# Altium PCB PCB1.PcbDoc
Units mm, origin at the board's own origin, x right, y up, seen from the top; angles counter-clockwise.
Board outline 81.5 x 88.9 mm, 2 copper layers (Top Layer, Bottom Layer); 24 components, 24 nets, 116 pads, 17 vias.
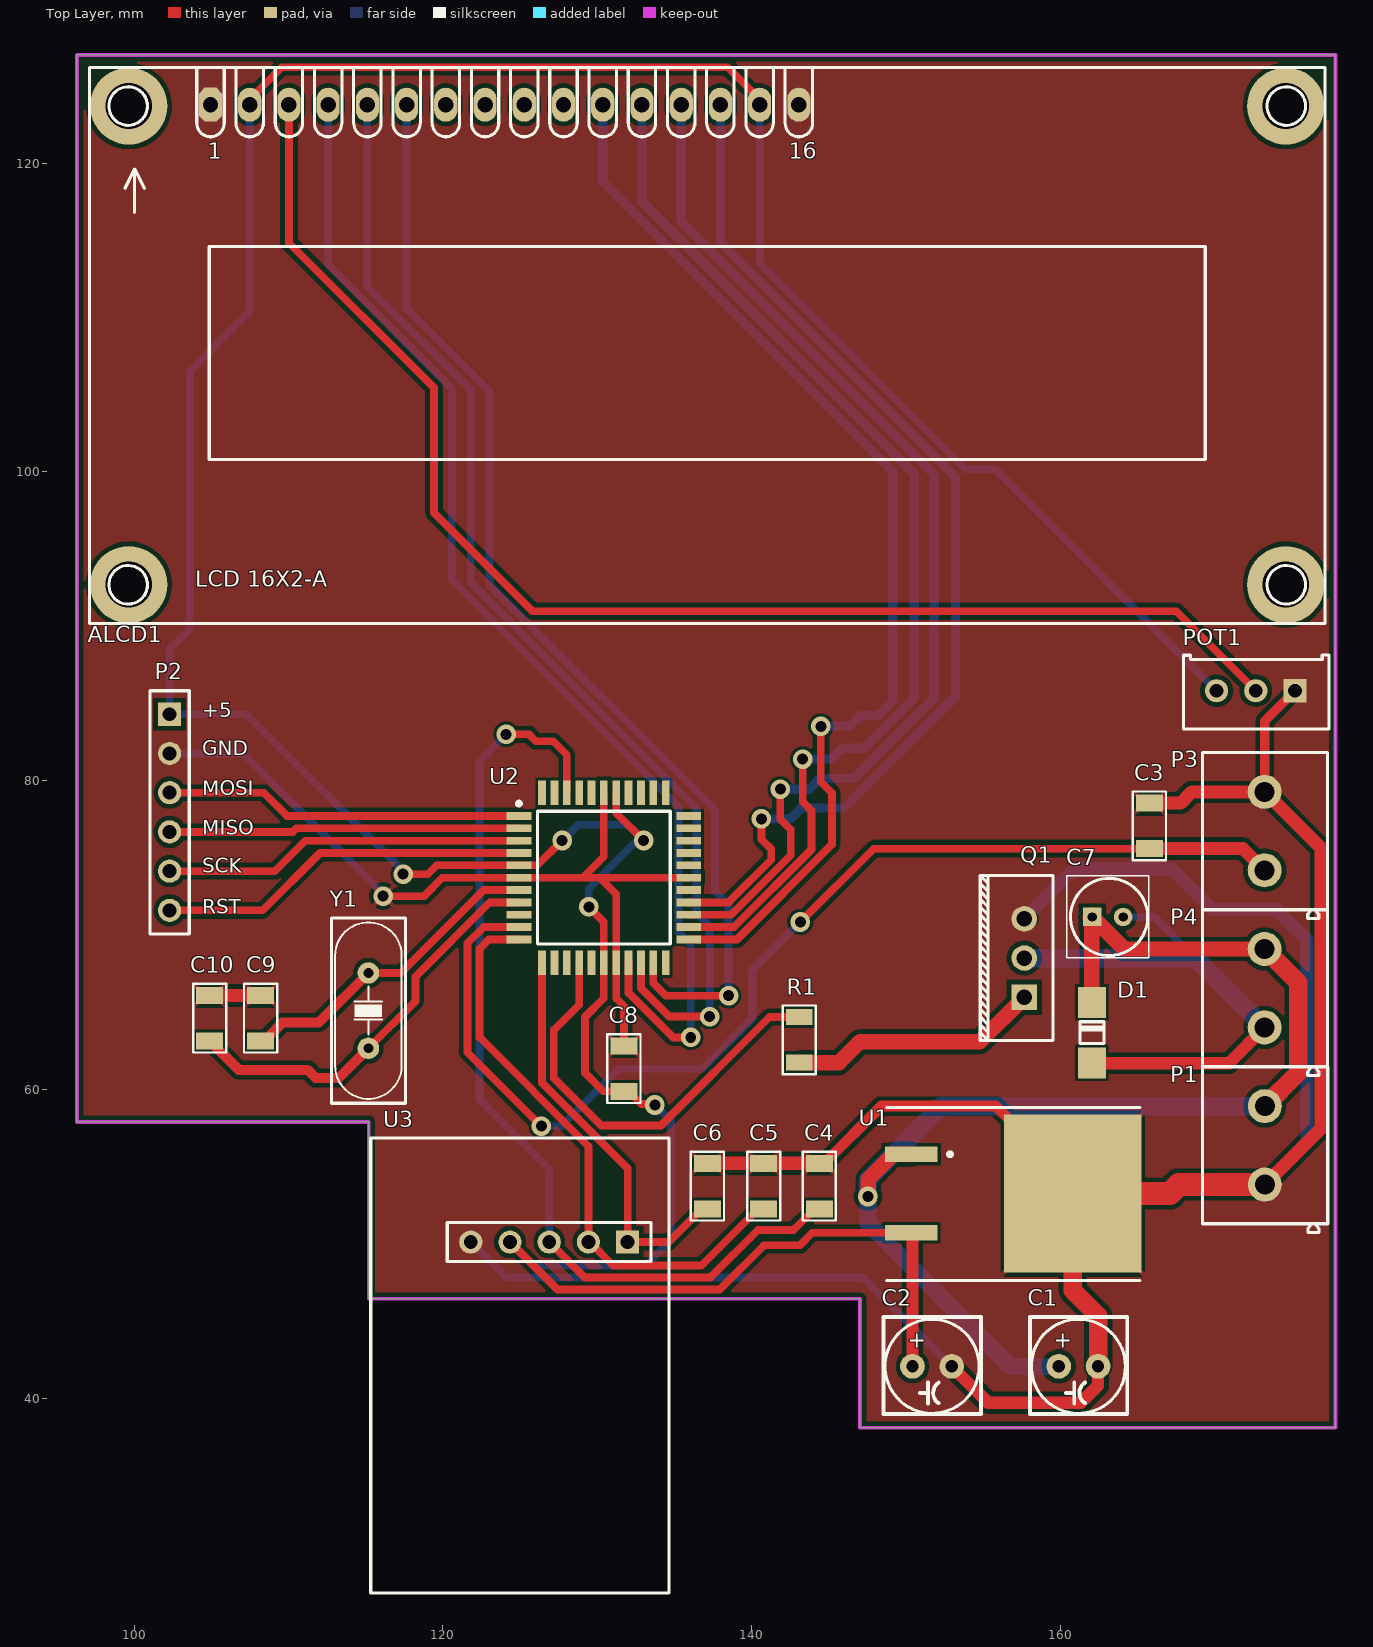
[diagram p0: Top Layer view]
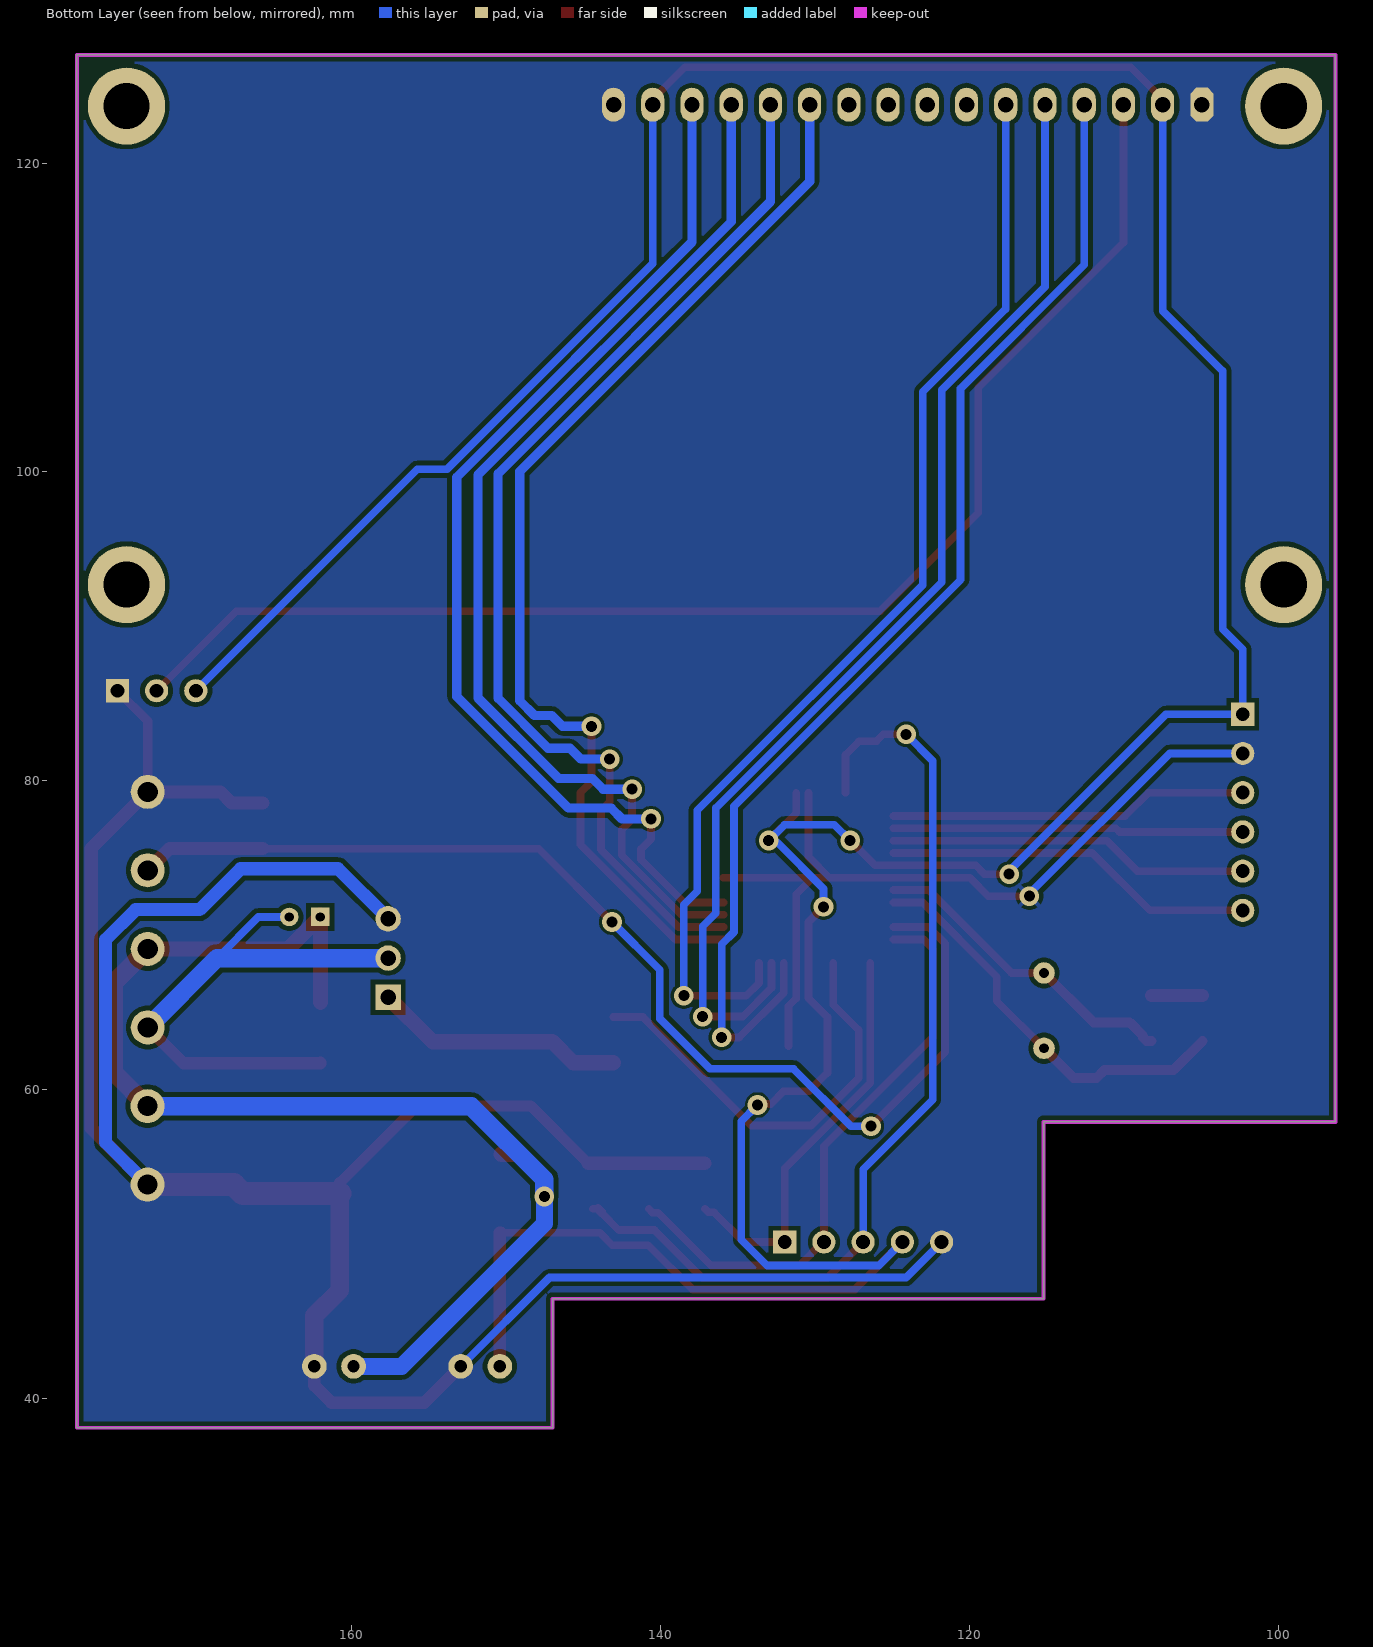
[diagram p1: Bottom Layer view, seen from below]
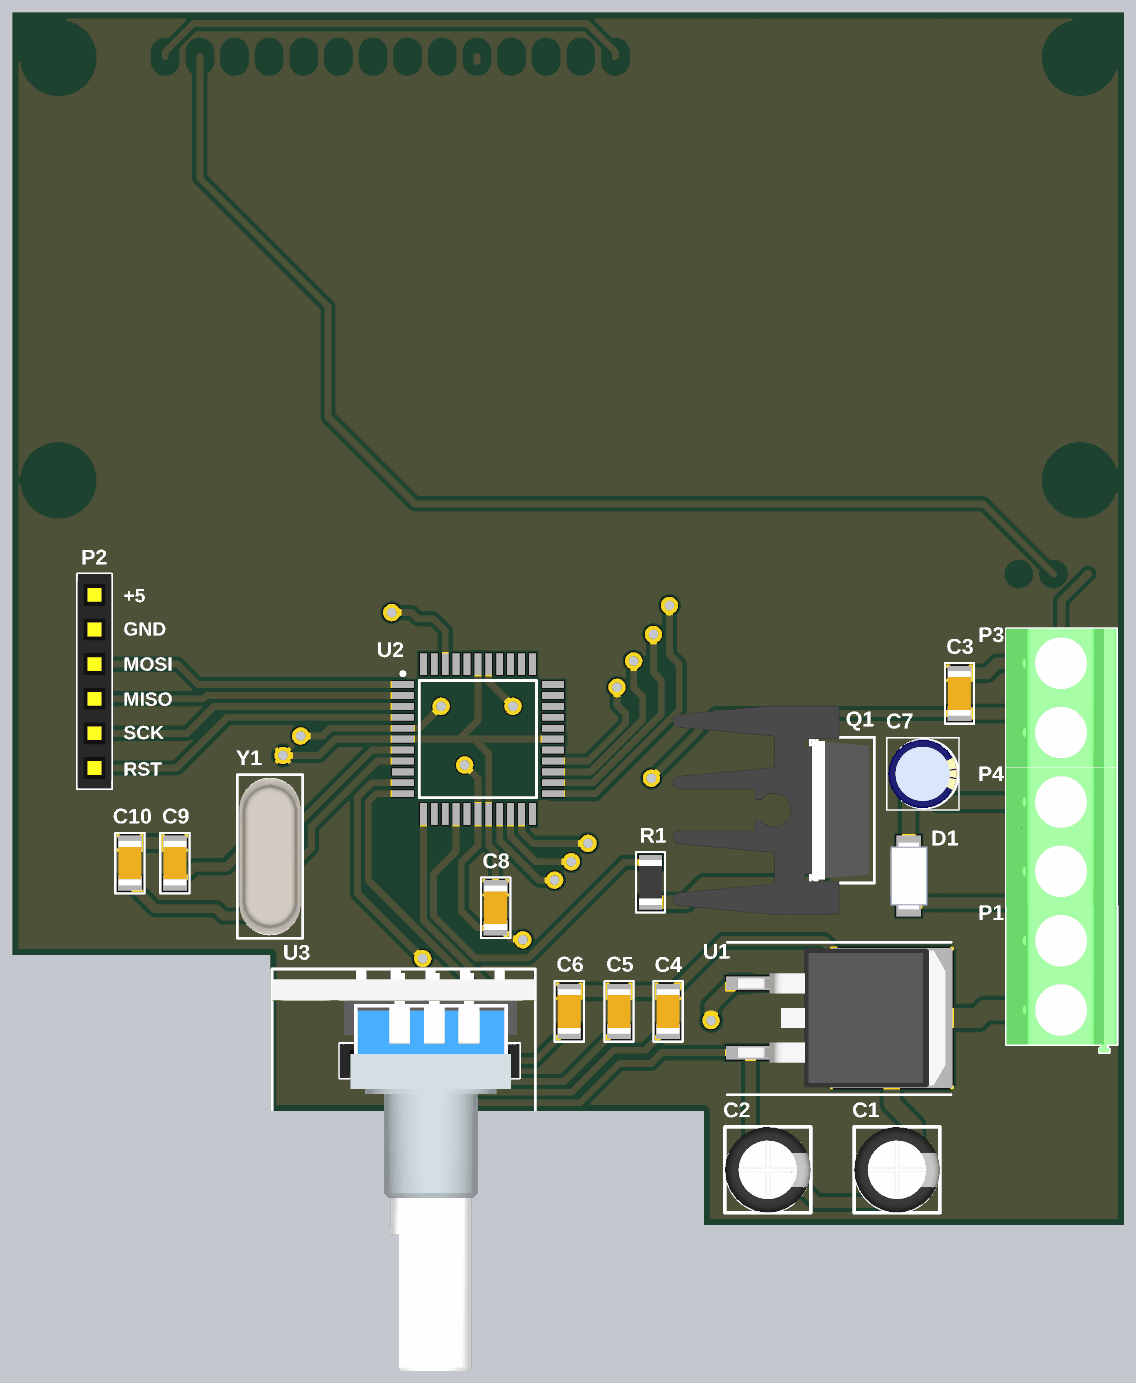
[diagram p2: 3D render of the assembled board from above, using the file's embedded part models]

## Layer stack, top to bottom
Top Solder: solder mask 0.0102, Solder Resist, Dk 3.5
Top Layer: signal copper 0.0356
Dielectric 1: dielectric 0.32, FR-4, Dk 4.8
Bottom Layer: signal copper 0.0356
Bottom Solder: solder mask 0.0102, Solder Resist, Dk 3.5

## Board outline
107.1,57.9 115.2,57.9 115.2,46.45 147,46.45 147,38.1 177.8,38.1 177.8,127 96.3,127 96.3,83.3 96.3,57.9

## Design rules (kind name [scope] priority, off if disabled: settings)
Clearance [All] p1: gap=0.02 ignorepadtopadclearanceinfootprint=FALSE except(0: Arc-Hole Track-Hole SMDPad-Hole THPad-Hole Via-Hole Fill-Hole Poly-Hole Region-Hole Text-Hole; 0.2: SMDPad-Poly Via-Fill Via-Poly Via-Region; 0.3: Arc-Fill Arc-Poly Arc-Region Track-Fill Track-Poly Track-Region SMDPad-Fill SMDPad-Region THPad-Fill THPad-Poly THPad-Region Fill-Fill Fill-Poly Fill-Region Poly-Poly Poly-Region Region-Region)
PolygonConnect [All] p1: thpad.connectstyle=Direct thpad.reliefconductorwidth=0.254 thpad.reliefentries=4 thpad.polygonreliefangle="90 Angle" thpad.airgapwidth=0.254 smdpad.connectstyle=Relief smdpad.reliefconductorwidth=0.3 smdpad.reliefentries=4 smdpad.polygonreliefangle="45 Angle" smdpad.airgapwidth=0.254 via.connectstyle=Relief via.reliefconductorwidth=0.3 via.reliefentries=4 via.polygonreliefangle="45 Angle" via.airgapwidth=0.254
RoutingVias [All] p1: holewidth=0.711 width=1.27 viastyle="Through Hole" minholewidth=0.711 minwidth=1.27 maxholewidth=0.711 maxwidth=1.27
SolderMaskExpansion [All] p1: expansion=0.102 istentingtop=FALSE
Width [All] p1: maxlimit=1.2 minlimit=0.3 preferedwidth=0.5
30 further rules are at their usual default settings.

## Classes and differential pairs
component class Sheet1: C1 C2 C3 C4 C5 C6 C7 C8 C9 C10 D1 P1 P2 P3 P4 POT1 Q1 R1 U1 U2 U3 Y1

## Components (designator, comment, footprint, x,y, rotation, side; value= is the part's Value field where it differs from the comment)
1 "Hitsink" "HITSINK 1" 152.25,68.419 r90 top
ALCD1 "LCD_2X16 BLUE" "LCD_2X16 BLUE" 298.434,210.571 r180 top
C1 "10uF" "Cap 6.3x12-2.5" 157.22,38.289 r0 top
C2 "10uF" "Cap 6.3x12-2.5" 147.745,38.289 r0 top
C3 "100nF" CAP1206 167.99,72.779 r90 top
C4 "100nF" CAP1206 146.615,49.454 r90 top
C5 "100nF" CAP1206 138.535,58.046 r270 top
C6 "100nF" CAP1206 134.885,58.046 r270 top
C7 "10uF" "Cap 5x12-2" 155.813,66.402 r0 top
C8 "100nF" CAP1206 129.485,65.646 r270 top
C9 "100nF" CAP1206 105.96,68.921 r270 top
C10 "100nF" CAP1206 102.66,68.921 r270 top
D1 "1n4007" "Diode 1N4007 SMD" 164.477,58.677 r90 top
P1 "2 PIN Phoenix MKDSN" "2 PIN Phoenix MKDSN" 173.86,53.972 r90 top
P2 "M-Header 6" "M-Header 6" 102.177,78.334 r270 top
P3 "button" "2 PIN Phoenix MKDSN" 173.85,74.325 r90 top
P4 "Solenoid" "2 PIN Phoenix MKDSN" 173.85,64.15 r90 top
POT1 "10k" "POT MULTITURN" 202.485,95.477 r180 top
Q1 "TIP122" TIP122 157.65,53.529 r90 top
R1 "2.2K" RES1206 145.051,58.798 r90 top
U1 "L7805CDT-TR" TO-263 158.225,50.85 r270 top
U2 "ATmega16-16AC" 44A 130.424,73.719 r0 top
U3 "rotary encoder" "rotary encoder" 126.885,49.871 r0 top
Y1 "16.00000MHz" "CRYSTAL Small" 119.112,58.733 r90 top

## Footprints (in the part's own frame and the unit in brackets; to place one, negate y for a bottom-side part, rotate by r counter-clockwise, add the part's x,y. Pads: shape width x height; smd on the part's side, far side on the other; paste and mask are expansions set on the pad)
"2 PIN Phoenix MKDSN" [mm]
  round 2.2 hole 1.3: 1(-0.127,0.635) 2(4.953,0.635)
  silkscreen extent -3.24,-3.44 7.49,4.66, body extent -3.23,-3.42 7.5,4.68, height 10.03
44A [mm] "QFP; 44 Leads; Body 10 x 10 mm; Pitch 0.8 mm"
  rect 1.6x0.5 smd: 1(-5.5,4) 2(-5.5,3.2) 3(-5.5,2.4) 4(-5.5,1.6) 5(-5.5,0.8) 6(-5.5,0) 7(-5.5,-0.8) 8(-5.5,-1.6) 9(-5.5,-2.4) 10(-5.5,-3.2) 11(-5.5,-4) 23(5.5,-4) 24(5.5,-3.2) 25(5.5,-2.4) 26(5.5,-1.6) 27(5.5,-0.8) 28(5.5,0) 29(5.5,0.8) 30(5.5,1.6) 31(5.5,2.4) 32(5.5,3.2) 33(5.5,4)
  rect 0.5x1.6 smd: 12(-4,-5.5) 13(-3.2,-5.5) 14(-2.4,-5.5) 15(-1.6,-5.5) 16(-0.8,-5.5) 17(0,-5.5) 18(0.8,-5.5) 19(1.6,-5.5) 20(2.4,-5.5) 21(3.2,-5.5) 22(4,-5.5) 34(4,5.5) 35(3.2,5.5) 36(2.4,5.5) 37(1.6,5.5) 38(0.8,5.5) 39(0,5.5) 40(-0.8,5.5) 41(-1.6,5.5) 42(-2.4,5.5) 43(-3.2,5.5) 44(-4,5.5)
  silkscreen extent -5.62,-4.3 4.3,4.92
CAP1206 [mm]
  rect 1.1x1.75 smd: 1(2.821,2.24) 2(5.771,2.24)
  silkscreen extent 2.07,1.17 6.52,3.31, body extent 2.65,1.39 5.95,3.09, height 0.94
"Cap 5x12-2" [mm]
  rect 1.2x1.2 hole 0.6: 1(6.237,4.773)
  round 1.2 hole 0.6: 2(8.237,4.773)
  silkscreen extent 4.6,2.12 9.9,7.43, body extent 4.7,2.24 9.78,7.31, height 12.2
"Cap 6.3x12-2.5" [mm]
  round 1.6 hole 0.8: 1(2.665,3.786) 2(5.205,3.786)
  silkscreen extent 0.8,0.7 7.1,6.99, body extent 0.79,0.7 7.1,6.98, height 1.2
"CRYSTAL Small" [mil]
  round 55 hole 25: 1(155,155) 2(347.13,155)
  silkscreen extent 15,61 487,249, body extent 25,66 477,244, height 142
"Diode 1N4007 SMD" [mm]
  rect 2x1.8 smd: 1(3.048,2.452) 2(6.968,2.452)
  silkscreen extent 4.32,1.64 5.71,3.28, body extent 2.51,1.09 7.51,3.79, height 2.16
"HITSINK 1" [mm]
  body extent -7.55,-4.69 7.75,7.57, height 25
"LCD_2X16 BLUE" [mm]
  oct 1.5x2.2 hole 1: 1(193.484,86.796)
  oval 1.5x2.2 hole 1: 2(190.944,86.796) 3(188.404,86.796) 4(185.864,86.796) 5(183.324,86.796) 6(180.784,86.796) 7(178.244,86.796) 8(175.704,86.796) 9(173.164,86.796) 10(170.624,86.796) 11(168.084,86.796) 12(165.544,86.796) 13(163.004,86.796) 14(160.464,86.796) 15(157.924,86.796) 16(155.384,86.796)
  round 5 hole 3: ""(123.846,117.871) ""(123.846,86.883) ""(198.776,117.871) ""(198.776,86.883)
  silkscreen extent 121.32,84.38 201.32,120.38, body extent 121.37,84.4 201.37,120.4, height 18.4
"M-Header 6" [mm]
  rect 1.5x1.5 hole 0.9: 1(-5.969,0.127)
  round 1.5 hole 0.9: 2(-3.429,0.127) 3(-0.889,0.127) 4(1.651,0.127) 5(4.191,0.127) 6(6.731,0.127)
  silkscreen extent -7.49,-1.14 8.25,1.4, body extent -7.49,-1.12 8.25,1.38, height 5
"POT MULTITURN" [mm]
  rect 1.5x1.5 hole 0.9: 1(27.305,9.652)
  round 1.5 hole 0.9: 2(32.385,9.652) 3(29.845,9.652)
  silkscreen extent 25.12,7.33 34.51,12.12, body extent 25.05,7.3 34.58,12.12, height 11.55
RES1206 [mm]
  rect 1.05x1.7 smd: 1(2.946,1.976) 2(5.896,1.976)
  silkscreen extent 2.2,0.92 6.64,3.04, body extent 2.77,1.13 6.07,2.83, height 0.94
"rotary encoder" [mm]
  rect 1.5x1.5 hole 0.9: 1(5.08,0.254)
  round 1.5 hole 0.9: 2(2.54,0.254) 3(0,0.254) 4(-2.54,0.254) 5(-5.08,0.254)
  silkscreen extent -11.56,-22.48 7.75,6.99, body extent -11.57,-22.5 7.76,7.06, height 30
TIP122 [mm]
  rect 1.65x1.65 hole 1: 1(12.446,0)
  round 1.65 hole 1: 2(14.986,0) 3(17.526,0)
  silkscreen extent 9.64,-1.85 20.34,2.85, body extent 9.91,-1.48 20.07,2.72, height 21.24
TO-263 [mm]
  rect 1x3.4 smd: 1(-4.956,-7.891) 3(0.124,-7.891)
  rect 10.25x8.9 smd: 2(-2.416,2.559)
  silkscreen extent -7.98,-9.5 3.22,6.9, body extent -7.5,-8.77 2.66,6.49, height 4.88

## Part data
C1 C2 C7: library part "Capacitor DIP", "Capacitor DIP"
C3 C4 C5 C6 C8 C9 C10: library part "Capacitor SMD", "Capacitor SMD"
D1: library part "Diode 1n4007", "Diode 1n4007"
P3 P4: library part "2 PIN Phoenix MKDSN"
POT1: library part Potentiometer
R1: library part "Resistor SMD", "Resistor SMD"
U2: "8-Bit AVR Microcontroller with 16K Bytes of In-System Programmable Flash Memory", Package Information="Latest Revision: 1995", Package Reference=44A, Datasheet="Latest Revision: 2466E-AVR-10/02", Published=17-Sep-2003, Publisher="Altium Limited", Revision="17-Dec-2003: PCB Footprint updated"
Y1: library part "XTAL DIP", "XTAL DIP"

## Via types
v1: diameter 1.27, hole 0.711, Top Layer to Bottom Layer, 17 vias

## Nets (pads, with @x,y where several pads share a name; then routed paths per layer and width w, separated by ;. In a path a pad name is that pad's centre, name@x,y a point inside that pad or via, vN(x,y) a via of type N, cw(c..) or ccw(c..) an arc to the next point about the centre after c; other vN are vias at no path point)
+5: ALCD1.2 ALCD1.15 C2.1 C8.2 P2.1 POT1.2 U1.3 U2.5 U2.17 U2.38 U3.4 | length 250.6
  Top Layer w0.5: ALCD1.2 107.49,124.125 109.565,126.2 138.435,126.2 140.51,124.125 ALCD1.15 ; v1(117.425,73.95) 119.025,73.95 119.594,74.519 U2.5 126.119,74.519 v1(127.725,76.125) ; U3.4 127.42,47.05 137.925,47.05 140.8,49.925 143.125,49.925 143.926,50.726 U1.3 ; v1(129.45,71.825) 130.424,70.851 U2.17 130.424,65.924 129.2,64.7 129.2,61.075 130.393,59.882 132.043,59.882 132.866,59.059 133.666,59.059 v1(133.725,59) ; U2.38 131.224,77.901 v1(133,76.125)
  Top Layer w0.8: U1.3 150.41,50.726 C2.1
  Bottom Layer w0.5: ALCD1.2 107.49,110.415 103.6,106.525 103.6,89.8 102.304,88.504 P2.1 107.272,84.303 117.425,74.15 v1(117.425,73.95) ; U3.4 125.87,48.6 133.1,48.6 134.775,50.275 134.775,57.95 v1(133.725,59) ; v1(127.725,76.125) 128.75,77.15 131.975,77.15 v1(133,76.125) 132.853,75.978 132.428,75.978 129.45,73 v1(129.45,71.825) ; ALCD1.15 140.51,113.49 153.834,100.166 155.759,100.166 POT1.2
+12: C1.1 C7.1 D1.2 P1.2 P4.2 U1.1 | length 80.9
  Top Layer w1: v1@147.538,53.088 147.538,54.188 149.134,55.784 149.134,55.806 U1.1 ; D1.2 C7.1@162.025,71.15 ; C7.1 164.122,69.103 P4.2
  Top Layer w1.2: v1(147.525,53.075) v1@147.538,53.088 ; C7.1@162.025,71.15 C7.1 ; P4.2 175.4,66.918 175.4,61.1 P1.2
  Bottom Layer w1.1: v1(147.525,53.075) 147.525,51.325 156.775,42.075 C1.1
  Bottom Layer w1.2: v1(147.525,53.075) 147.525,54.175 152.275,58.925 P1.2
GND: ALCD1.1 ALCD1.16 C1.2 C2.2 C3.2 C4.2 C5.1 C6.1 C8.1 C9.1 C10.1 P1.1 P2.2 P3.2 POT1.1 Q1.3 U1.2 U2.6 U2.18 U2.28 U2.39 U3.5 | length 240.4
  Top Layer w0.5: v1(116.125,72.525) 118.775,72.525 119.969,73.719 U2.6 129.069,73.719 ; U2.39 130.424,75.074 129.069,73.719 ; C8.1 131.725,65.4 131.224,65.901 131.224,72.651 130.156,73.719 ; U2.28 130.156,73.719 ; 129.069,73.719 130.156,73.719
  Top Layer w0.6: P3.2 173.215,83.86 POT1.1
  Top Layer w0.7: C4.2@144.7,55.225 148.4,58.925 155.8,58.925 U1.2@160.784,53.941 ; Q1.3 Q1.3@157.907,71.055
  Top Layer w0.8: C2.2 155.3,39.725 161.325,39.725 162.425,40.825 C1.2 ; U1.2 U1.2@160.784,53.941
  Top Layer w0.85: C10.1 C9.1 ; C6.1 C5.1 C4.2 C4.2@144.7,55.225 ; C3.2 167.775,78.55 168.503,79.278 P3.2 176.875,75.618 176.875,57.495 P1.1
  Top Layer w1.2: U1.2 160.784,46.991 162.425,45.35 C1.2
  Top Layer w1.5: U1.2 167.066,53.266 167.645,53.845 P1.1
  Bottom Layer w0.5: P2.2 107.037,81.763 116.125,72.675 v1(116.125,72.525) ; U3.5 124.105,47.825 147.2,47.825 C2.2
  Bottom Layer w0.85: Q1.3 160.895,74.3 167.2,74.3 169.85,71.65 174,71.65 175.95,69.7 175.95,56.57 P1.1
NetALCD1_3: ALCD1.3 POT1.3 | length 88.3
  Top Layer w0.5: ALCD1.3 110.03,114.845 119.425,105.45 119.425,97.35 125.8,90.975 167.49,90.975 POT1.3
NetALCD1_4: ALCD1.4 U2.19 | length 77.3
  Top Layer w0.5: U2.19 132.024,66.251 134.9,63.375 v1(136.05,63.375)
  Bottom Layer w0.5: ALCD1.4 112.57,113.405 120.575,105.4 120.575,93.025 135.25,78.35 135.25,70.2 136.05,69.4 v1(136.05,63.375)
NetALCD1_5: ALCD1.5 U2.20 | length 75.1
  Top Layer w0.5: U2.20 132.824,66.576 134.675,64.725 v1(137.275,64.725)
  Bottom Layer w0.5: ALCD1.5 115.11,111.99 121.8,105.3 121.8,92.85 136.425,78.225 136.425,71.425 137.275,70.575 v1(137.275,64.725)
NetALCD1_6: ALCD1.6 U2.21 | length 72.9
  Top Layer w0.5: U2.21 133.624,66.901 134.45,66.075 v1(138.5,66.075)
  Bottom Layer w0.5: ALCD1.6 117.65,110.55 123.025,105.175 123.025,92.675 137.625,78.075 137.625,72.85 138.5,71.975 v1(138.5,66.075)
NetALCD1_11: ALCD1.11 U2.23 | length 71.8
  Top Layer w0.5: ALCD1.11@130.35,123.425 ALCD1.11 ; U2.23 139.044,69.719 145.193,75.868 145.193,79.221 144.475,79.939 v1(144.475,83.525)
  Bottom Layer w0.6: ALCD1.11 130.35,118.8 149.125,100.025 149.125,85.182 148.168,84.225 147.05,84.225 146.35,83.525 v1(144.475,83.525)
NetALCD1_12: ALCD1.12 U2.24 | length 70.7
  Top Layer w0.5: U2.24 138.844,70.519 143.868,75.543 143.868,78.058 143.3,78.626 v1(143.3,81.4)
  Bottom Layer w0.6: ALCD1.12 132.89,117.505 150.525,99.87 150.525,85.332 147.293,82.1 145.875,82.1 145.175,81.4 v1(143.3,81.4)
NetALCD1_13: ALCD1.13 U2.25 | length 70.4
  Top Layer w0.5: U2.25 138.669,71.319 142.518,75.168 142.518,76.833 141.85,77.501 v1(141.85,79.45)
  Bottom Layer w0.6: ALCD1.13 135.43,116.205 151.825,99.81 151.825,85.357 146.618,80.15 144.425,80.15 143.725,79.45 v1(141.85,79.45)
NetALCD1_14: ALCD1.14 U2.26 | length 69.9
  Top Layer w0.5: U2.26 138.494,72.119 141.268,74.893 141.268,75.574 140.625,76.217 v1(140.625,77.525)
  Bottom Layer w0.6: ALCD1.14 137.97,114.88 153.2,99.65 153.2,85.457 145.968,78.225 143.2,78.225 142.5,77.525 v1(140.625,77.525)
NetC3_1: C3.1 P3.1 U2.10 | length 74.3
  Top Layer w0.5: U2.10 122.644,70.519 121.588,69.462 121.588,62.412 v1(126.375,57.625) ; v1(143.15,70.85) 147.9,75.6 C3.1
  Top Layer w0.85: C3.1 171.813,75.6 P3.1
  Bottom Layer w0.5: v1(126.375,57.625) 127.675,57.625 131.4,61.35 136.8,61.35 140.05,64.6 140.05,67.75 v1(143.15,70.85)
NetC4_1: C4.1 U2.42 U3.3 | length 62.7
  Top Layer w0.5: v1(124.1,83) 125.575,83 126.025,82.55 127.15,82.55 128.024,81.676 U2.42 ; U3.3 129.185,47.825 137.325,47.825 140.4,50.9 142.7,50.9 C4.1@143.8,52 ; C4.1@144.05,52.275 C4.1
  Top Layer w0.6: C4.1@143.8,52 143.8,52.025 C4.1@144.05,52.275
  Bottom Layer w0.5: v1(124.1,83) 122.375,81.275 122.375,59.35 126.885,54.84 U3.3
NetC5_2: C5.2 U2.11 U3.2 | length 38.2
  Top Layer w0.5: U2.11 122.969,69.719 122.375,69.125 122.375,63.375 129.425,56.325 U3.2 129.506,50.125 131.031,48.6 136.725,48.6 140.15,52.025 140.525,52.025 C5.2
NetC6_2: C6.2 U2.12 U3.1 | length 26.4
  Top Layer w0.5: U2.12 126.424,60.426 131.965,54.885 U3.1 134.625,50.125 136.55,52.05 136.9,52.05 C6.2
NetC7_2: C7.2 D1.1 P4.1 Q1.2 | length 35.4
  Top Layer w0.8: D1.1 162.045,61.705 170.897,61.705 P4.1
  Bottom Layer w0.5: C7.2 166.063,71.175 168.723,68.515
  Bottom Layer w1.2: Q1.2 168.723,68.515 P4.1
NetC9_2: C9.2 U2.7 Y1.2 | length 20.8
  Top Layer w0.5: Y1.2 117.275,67.55 122.644,72.919 U2.7
  Top Layer w0.65: C9.2 108.525,63.15 108.75,63.375 108.75,63.475 109.625,64.35 111.975,64.35 Y1.2
NetC10_2: C10.2 U2.8 Y1.1 | length 26.7
  Top Layer w0.5: Y1.1 118.225,65.72 118.225,67.3 123.044,72.119 U2.8
  Top Layer w0.65: C10.2 106.775,61.275 111.241,61.275 111.766,60.75 113.255,60.75 Y1.1
NetP2_3: P2.3 U2.1 | length 23.2
  Top Layer w0.5: P2.3 108.402,79.223 109.906,77.719 U2.1
NetP2_4: P2.4 U2.2 | length 22.7
  Top Layer w0.5: P2.4 110.283,76.683 110.519,76.919 U2.2
NetP2_5: P2.5 U2.3 | length 23.4
  Top Layer w0.5: P2.5 109.118,74.143 111.094,76.119 U2.3
NetP2_6: P2.6 U2.4 | length 24.2
  Top Layer w0.5: P2.6 108.328,71.603 112.044,75.319 U2.4
NetQ1_1: Q1.1 R1.1 | length 16.3
  Top Layer w1: R1.1 145.661,61.744 147.017,63.1 154.775,63.1 Q1.1
NetR1_2: R1.2 U2.15 | length 28.2
  Top Layer w0.5: U2.15 128.824,65.499 127.175,63.85 127.175,60.75 130.25,57.675 134.125,57.675 141.144,64.694 R1.2
pads on no net: ALCD1. ALCD1.7 ALCD1.8 ALCD1.9 ALCD1.10 U2.9 U2.13 U2.14 U2.16 U2.22 U2.27 U2.29 U2.30 U2.31 U2.32 U2.33 U2.34 U2.35 U2.36 U2.37 U2.40 U2.41 U2.43 U2.44

## Polygon pours and split planes (outlines as drawn)
GND on Top Layer "GND_L01_P000" (solid, remove dead copper, pour order 0): 96.3,127 177.8,127 177.8,38.1 147,38.1 147,46.45 115.2,46.45 115.2,57.9 96.3,57.9
GND on Bottom Layer "GND_L02_P001" (solid, remove dead copper, pour order 1): 115.2,46.45 115.2,57.9 96.3,57.9 96.3,127 177.8,127 177.8,38.1 147,38.1 147,46.45

## Keep-outs
Keep-Out Layer:
  lines w0.254: 96.3,57.9 98.8,57.9 107.1,57.9 115.2,57.9 115.2,46.45 121.05,46.45 143.675,46.45 147,46.45 147,38.1 159.375,38.1 177.8,38.1 177.8,127 96.3,127 96.3,83.3 96.3,57.9

## Silkscreen, mask and mechanical layers (free items; w line width, h text height)
Top Overlay:
  text "+5" at 104.425,83.769 h1.6
  text "GND" at 104.425,81.319 h1.6
  text "MOSI" at 104.425,78.744 h1.6
  text "MISO" at 104.425,76.169 h1.6
  text "SCK" at 104.425,73.719 h1.6
  text "RST" at 104.425,71.044 h1.6

## Text inside footprints (layer, text, board x,y; h text height)
ALCD1: Top Overlay "1" at 104.775,119.925 h1.78; Top Overlay "16" at 142.4,119.925 h1.78; Top Overlay "LCD 16X2-A" at 103.976,92.192 h1.78
C1: Top Overlay "+" at 159.565,42.915 h1.78
C2: Top Overlay "+" at 150.09,42.915 h1.78